# EAGLE board PhycomBridge(Beginner)V6 (EAGLE 9.4.1)
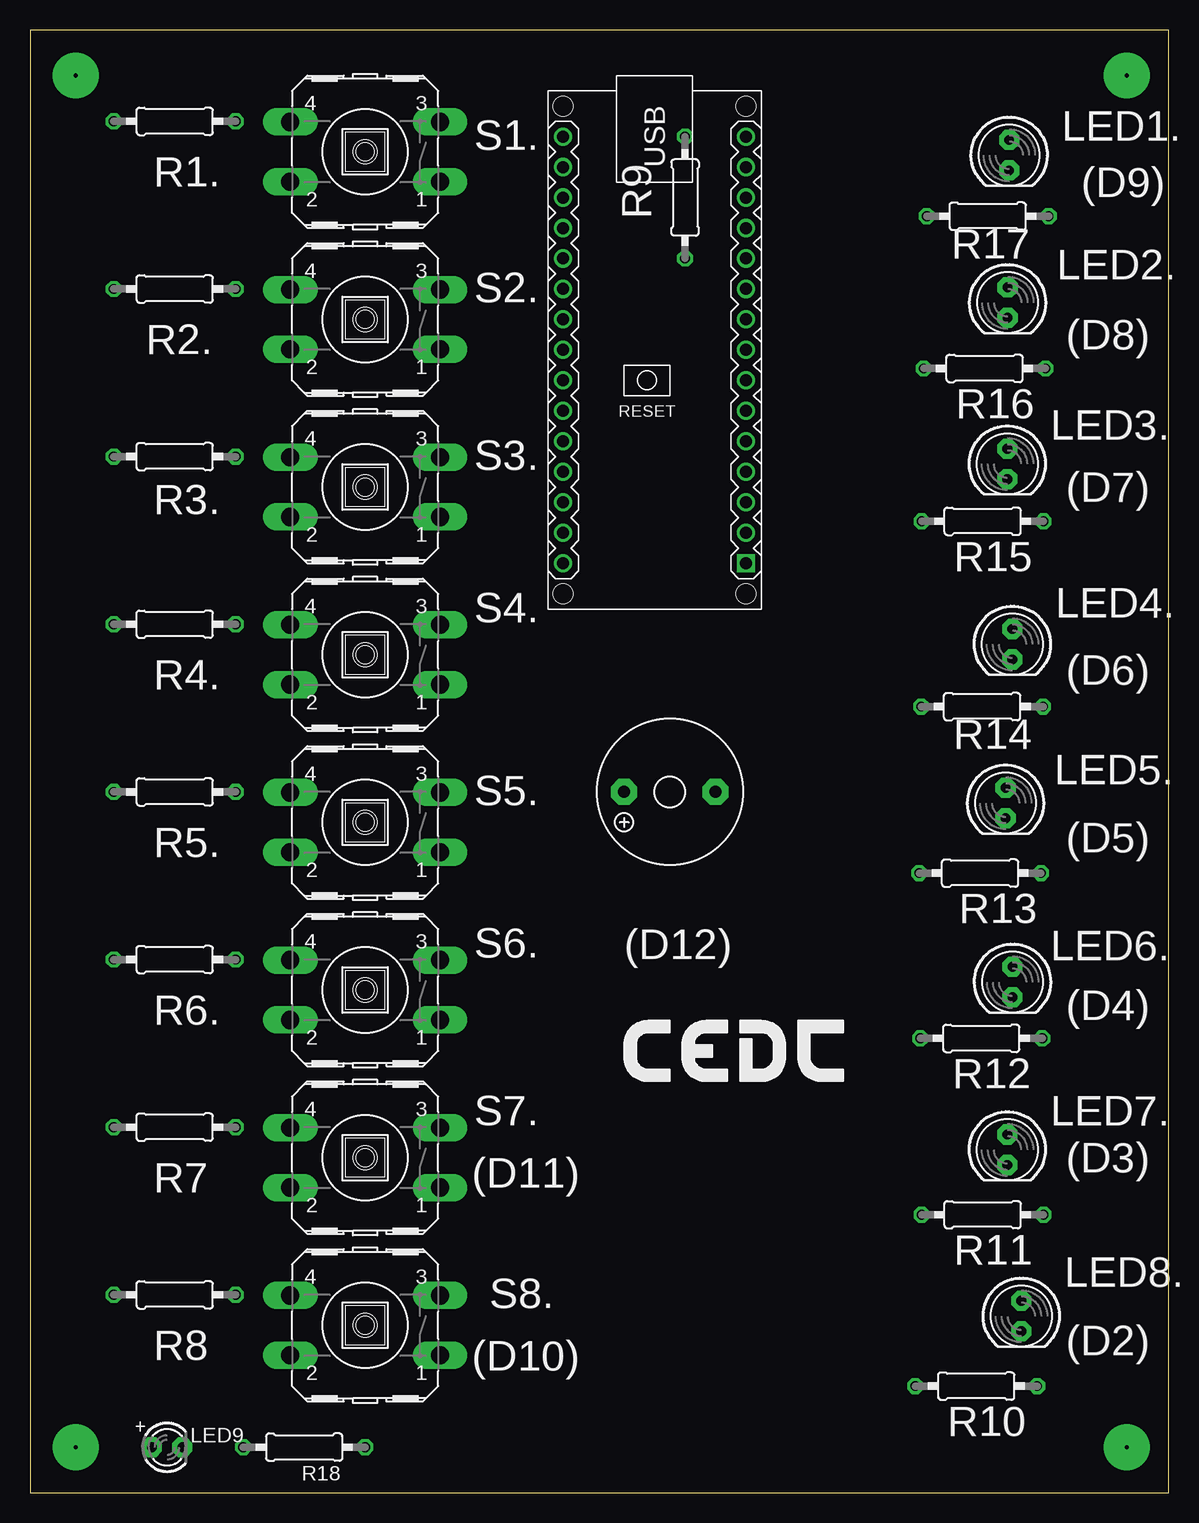
[diagram p0: board, top side]
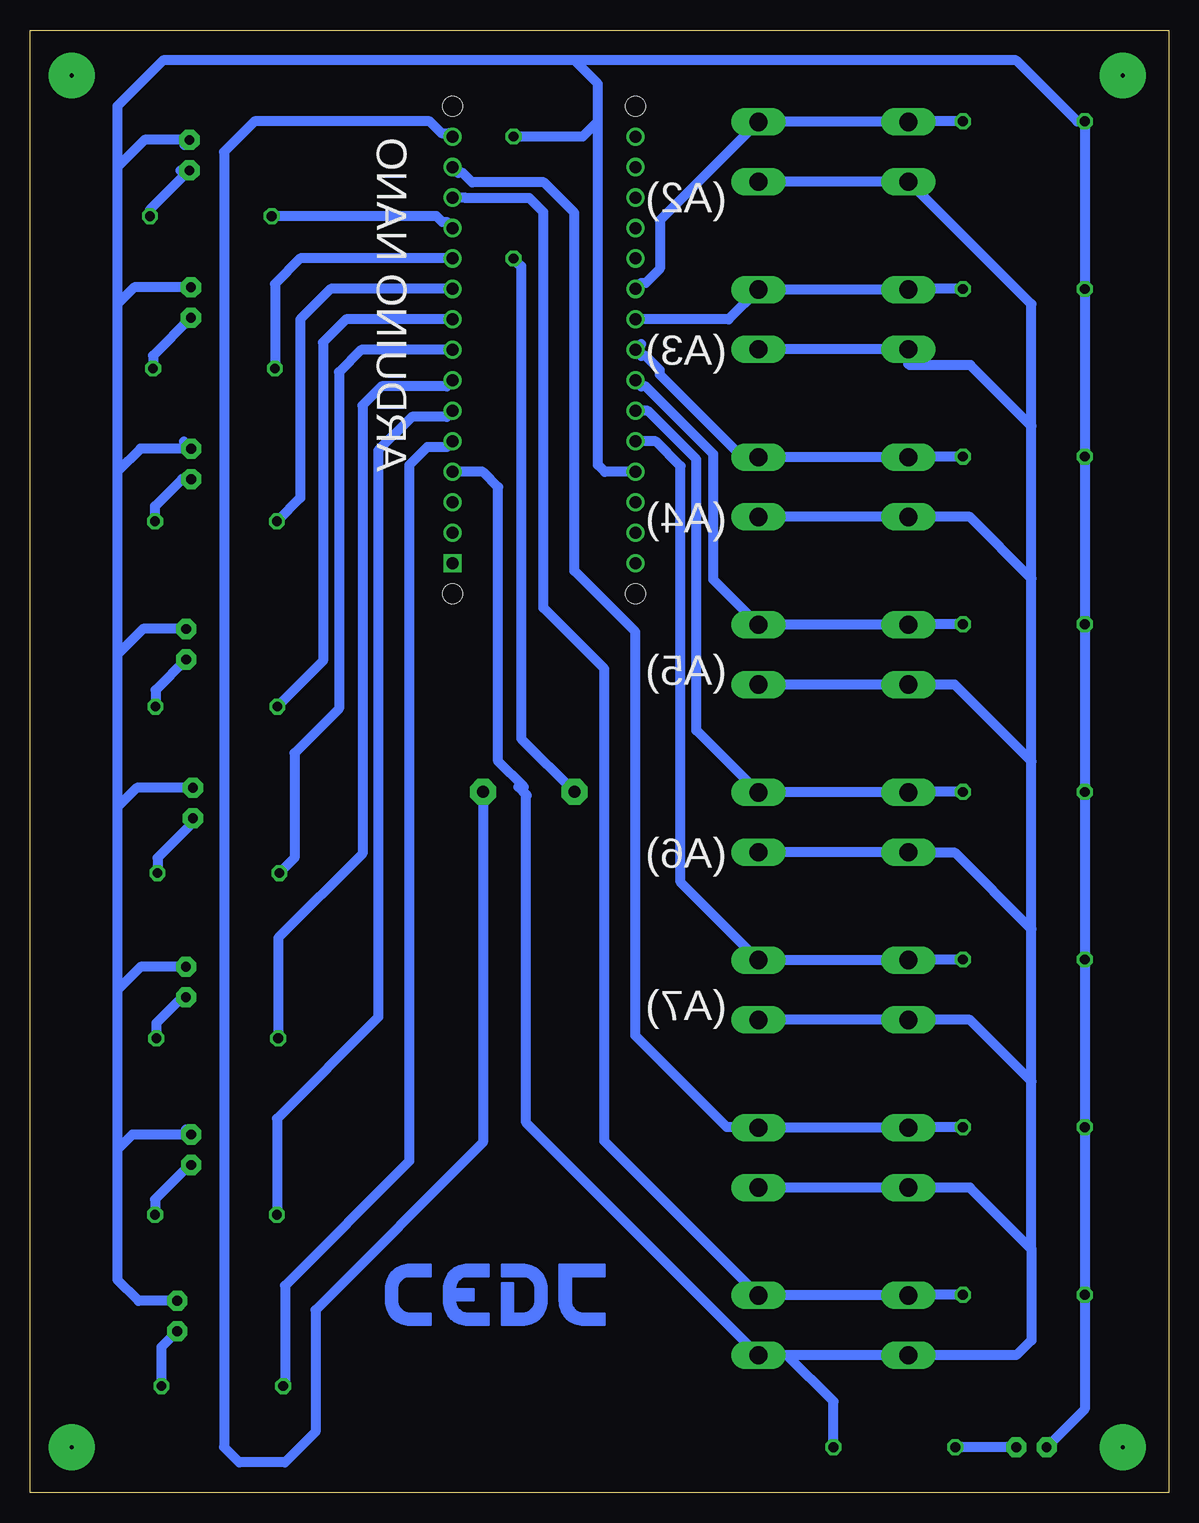
[diagram p1: board, bottom side, seen from below]

Size 94.92 x 121.91 mm. Coordinates in mm from the lower left corner, seen from the top.
Outline: 0,0 94.92,0 94.92,121.91 0,121.91 0,0
Copper layers (1*16): Top 0.035mm / dielectric 1.5mm / Bottom 0.035mm
Design rules "default *": minimum track width 6mil, minimum drill 0.35mm, track to track 20mil, track to pad 35mil, pad to pad 20mil, via to via 20mil, smd to smd 20mil, copper to edge 40mil, drill to drill 6mil, minimum pad ring 10mil, minimum via ring 8mil, stop-mask expansion 4mil, vias tented up to drill 0mil, thermal gap 10mil

## Footprints (pad centres in the part's own frame; a part is rotated, then mirrored left to right if it is on the bottom)
ARDUINO-NANO-3.0 = drill 1 square: J1.1 17.78,7.62 | drill 1: J1.2 15.24,7.62; J1.3 12.7,7.62; J1.4 10.16,7.62; J1.5 7.62,7.62; J1.6 5.08,7.62; J1.7 2.54,7.62; J1.8 0,7.62; J1.9 -2.54,7.62; J1.10 -5.08,7.62; J1.11 -7.62,7.62; J1.12 -10.16,7.62; J1.13 -12.7,7.62; J1.14 -15.24,7.62; J1.15 -17.78,7.62; J2.1 17.78,-7.62; J2.2 15.24,-7.62; J2.3 12.7,-7.62; J2.4 10.16,-7.62; J2.5 7.62,-7.62; J2.6 5.08,-7.62; J2.7 2.54,-7.62; J2.8 0,-7.62; J2.9 -2.54,-7.62; J2.10 -5.08,-7.62; J2.11 -7.62,-7.62; J2.12 -10.16,-7.62; J2.13 -12.7,-7.62; J2.14 -15.24,-7.62; J2.15 -17.78,-7.62 | hole 1.651: -20.32,7.62; -20.32,-7.62; 20.32,-7.62; 20.32,7.62
LED5MM = drill 0.813 pad 1.676 octagon: A -1.27,0; K 1.27,0
LED3MM = drill 0.813 pad 1.676 octagon: A -1.27,0; K 1.27,0
0207/10 = drill 0.813 octagon: 1 -5.08,0; 2 5.08,0
B3F-40XX = drill 1.524 long: 1 -6.248,2.489; 2 6.248,2.489; 3 -6.248,-2.489; 4 6.248,-2.489
F/TMB = drill 1.016 pad 2.159 octagon: + 3.81,0; - -3.81,0

## Placement (x,y rotation side)
ARDUINO_NANO  ARDUINO-NANO-3.0  [ARDUINO-NANO-3.0]  52.07,95.25 270 top
LED1.  [LED5MM]  81.63,111.48 270 top
LED2.  [LED5MM]  81.5,99.19 270 top
LED3.  [LED5MM]  81.48,85.75 270 top
LED4.  [LED5MM]  81.9,70.73 270 top
LED5.  [LED5MM]  81.33,57.49 270 top
LED6.  [LED5MM]  81.91,42.57 270 top
LED7.  [LED5MM]  81.48,28.6 270 top
LED8.  [LED5MM]  82.64,14.74 270 top
LED9  [LED3MM]  11.43,3.81 0 top
LOGO1  LOGO-CEDTBOT-18MM  [LOGO-CEDT-BOT-18MM]  46.99,13.97 0 top
LOGO2  LOGO-CEDTSILK-18MM  [LOGO-CEDT-SILK-18MM]  49.53,34.29 0 top
R1.  10k  [0207/10]  12.06,114.3 0 top
R2.  10k  [0207/10]  12.06,100.33 0 top
R3.  10k  [0207/10]  12.06,86.36 0 top
R4.  10k  [0207/10]  12.06,72.39 0 top
R5.  10k  [0207/10]  12.06,58.42 0 top
R6.  10k  [0207/10]  12.06,44.45 0 top
R7  10k  [0207/10]  12.06,30.48 0 top
R8  10k  [0207/10]  12.06,16.51 0 top
R9  1K  [0207/10]  54.61,107.95 90 top
R10  220  [0207/10]  78.89,8.9 0 top
R11  220  [0207/10]  79.41,23.18 0 top
R12  220  [0207/10]  79.31,37.88 0 top
R13  220  [0207/10]  79.21,51.65 0 top
R14  220  [0207/10]  79.38,65.53 0 top
R15  220  [0207/10]  79.41,80.97 0 top
R16  220  [0207/10]  79.58,93.71 0 top
R17  220  [0207/10]  79.84,106.39 0 top
R18  220  [0207/10]  22.86,3.81 180 top
S1.  OMRON_40-XX  [B3F-40XX]  27.94,111.76 180 top
S2.  OMRON_40-XX  [B3F-40XX]  27.94,97.79 180 top
S3.  OMRON_40-XX  [B3F-40XX]  27.94,83.82 180 top
S4.  OMRON_40-XX  [B3F-40XX]  27.94,69.85 180 top
S5.  OMRON_40-XX  [B3F-40XX]  27.94,55.88 180 top
S6.  OMRON_40-XX  [B3F-40XX]  27.94,41.91 180 top
S7.  OMRON_40-XX  [B3F-40XX]  27.94,27.94 180 top
S8.  OMRON_40-XX  [B3F-40XX]  27.94,13.97 180 top
SG1  BUZZER  [F/TMB]  53.34,58.42 180 top

## Library data of the parts
ARDUINO_NANO = diy-modules
LED1. LED2. LED3. LED4. LED5. LED6. LED7. LED8. LED9 = adafruit
LOGO1 LOGO2 = CEDT_JANUARY_2015_v5
R1. R2. R3. R4. R5. R6. R7-R18 S1. S2. S3. S4. S5. S6. S7. S8. = CEDT_JANUARY_2015_v5 (2)
SG1 = CEDT_JANUARY_2015_v5 (2); OC_FARNELL: unknown; OC_NEWARK: unknown

## Nets
3V3: ARDUINO_NANO.J2.14
+VCC: ARDUINO_NANO.J2.4 LED1..A LED2..A LED3..A LED4..A LED5..A LED6..A LED7..A LED8..A LED9.A R1..1 R2..1 R3..1 R4..1 R5..1 R6..1 R7.1 R8.1 R9.2
.: R9.1 SG1.+
BUZ: ARDUINO_NANO.J1.15 SG1.-
GND: ARDUINO_NANO.J1.4 R18.1 S1..1 S1..2 S2..1 S2..2 S3..1 S3..2 S4..1 S4..2 S5..1 S5..2 S6..1 S6..2 S7..1 S7..2 S8..1 S8..2
GND.2: ARDUINO_NANO.J2.2
LED_1: ARDUINO_NANO.J1.12 R17.1
LED_2: ARDUINO_NANO.J1.11 R16.1
LED_3: ARDUINO_NANO.J1.10 R15.1
LED_4: ARDUINO_NANO.J1.9 R14.1
LED_5: ARDUINO_NANO.J1.8 R13.1
LED_6: ARDUINO_NANO.J1.7 R12.1
LED_7: ARDUINO_NANO.J1.6 R11.1
LED_8: ARDUINO_NANO.J1.5 R10.1
N$1: LED7..K R11.2
N$2: LED6..K R12.2
N$3: LED2..K R16.2
N$4: LED1..K R17.2
N$5: LED5..K R13.2
N$6: LED4..K R14.2
N$7: LED8..K R10.2
N$9: LED3..K R15.2
N$16: LED9.K R18.2
N$36: ARDUINO_NANO.J2.15
S1: ARDUINO_NANO.J2.10 R1..2 S1..3 S1..4
S2: ARDUINO_NANO.J2.9 R2..2 S2..3 S2..4
S3: ARDUINO_NANO.J2.8 R3..2 S3..3 S3..4
S4: ARDUINO_NANO.J2.7 R4..2 S4..3 S4..4
S5: ARDUINO_NANO.J2.6 R5..2 S5..3 S5..4
S6: ARDUINO_NANO.J2.5 R6..2 S6..3 S6..4
S7: ARDUINO_NANO.J1.14 R7.2 S7..3 S7..4
S8: ARDUINO_NANO.J1.13 R8.2 S8..3 S8..4
VIN: ARDUINO_NANO.J2.1

## Tracks (layer width: path | path; a pad name or v marks a point on that pad's centre or on a via)
+VCC
  Bottom 0.813: ARDUINO_NANO.J2.4 46.99,85.09 47.57,85.67 47.57,114.3 | 49.53,119.38 12.7,119.38 7.62,114.3 R1..1 R2..1 R3..1 R4..1 R5..1 R6..1 R7.1 R8.1 6.99,6.99 LED9.A | 49.53,119.38 83.82,119.38 87.63,115.57 87.63,110.49 | 81.91,30.3 LED7..A 86.36,29.87 87.63,28.6 | 82.09,87.63 LED3..A 85.7,87.02 87.63,85.09 | 87.63,28.6 87.63,17.78 85.86,16.01 LED8..A | 47.57,114.3 47.57,117.42 49.53,119.38 | 47.57,114.3 48.84,113.03 R9.2 | 82.04,112.34 LED1..A 85.37,112.75 87.63,110.49 | 87.63,110.49 87.63,99.06 | 87.63,99.06 87.63,85.09 | 87.63,85.09 87.63,69.85 | 87.63,69.85 87.63,57.15 | 87.63,57.15 87.63,41.91 | 87.63,41.91 87.63,28.6 | LED2..A 86.23,100.46 87.63,99.06 | LED4..A 85.48,72 87.63,69.85 | LED5..A 86.02,58.76 87.63,57.15 | LED6..A 85.7,43.84 87.63,41.91
.
  Bottom 0.813: R9.1 53.98,102.23 53.98,62.87 SG1.+
BUZ
  Bottom 0.813: SG1.- 57.15,29.21 71.12,15.24 71.12,5.08 73.66,2.54 77.47,2.54 78.74,3.81 78.74,111.76 76.2,114.3 61.6,114.3 60.62,113.32 59.98,113.32 ARDUINO_NANO.J1.15
GND
  Bottom 0.813: S1..1 S1..2 21.64,109.22 21.59,109.22 11.43,99.06 11.43,88.9 | S2..1 S2..2 21.69,94.08 21.59,93.98 16.51,93.98 11.43,88.9 | S2..1 33.6,95.3 | S2..1 34.19,94.72 | S3..1 S3..2 16.56,81.33 11.43,76.2 | S5..1 S5..2 22.81,53.39 22.86,53.34 17.78,53.34 11.43,46.99 | S6..1 S6..2 16.56,39.42 11.43,34.29 | S4..1 S4..2 17.83,67.36 11.43,60.96 | S8..1 S8..2 12.7,11.48 11.48,12.7 11.43,12.7 11.43,20.32 | 11.43,20.32 11.43,34.29 | 11.43,34.29 11.43,46.99 | 11.43,46.99 11.43,60.96 | 11.43,60.96 11.43,76.2 | 11.43,76.2 11.43,88.9 | S7..1 S7..2 16.56,25.45 11.43,20.32 | 53.51,58.13 53.57,58.19 | 53.57,58.19 54.2,58.83 53.75,58.83 55.88,60.96 55.88,83.82 57.15,85.09 ARDUINO_NANO.J1.4 | R18.1 27.94,7.62 31.8,11.48 S8..1 | S8..1 53.57,30.86 53.57,58.19
LED_1
  Bottom 0.813: ARDUINO_NANO.J1.12 60.18,105.9 60.54,105.9 61.03,106.39 R17.1
LED_2
  Bottom 0.813: ARDUINO_NANO.J1.11 72.39,102.87 74.5,100.76 R16.1
LED_3
  Bottom 0.813: ARDUINO_NANO.J1.10 69.85,100.33 72.39,97.79 72.39,82.91 R15.1
LED_4
  Bottom 0.813: ARDUINO_NANO.J1.9 68.58,97.79 70.48,95.89 70.48,69.34 R14.1
LED_5
  Bottom 0.813: ARDUINO_NANO.J1.8 67.31,95.25 69.16,93.4 69.16,65.35 72.86,61.66 72.86,52.92 R13.1
LED_6
  Bottom 0.813: ARDUINO_NANO.J1.7 60.18,92.22 65.62,92.22 67.21,90.63 67.21,53.27 74.23,46.25 R12.1
LED_7
  Bottom 0.813: ARDUINO_NANO.J1.6 60.18,89.68 63.08,89.68 65.89,86.87 65.89,39.65 74.33,31.2 R11.1
LED_8
  Bottom 0.813: ARDUINO_NANO.J1.5 60.18,87.14 61.81,87.14 63.3,85.65 63.3,27.64 73.66,17.28 73.66,8.89 73.8,8.89 R10.1
N$1
  Bottom 0.813: LED7..K 81.62,27.33 84.49,24.45 R11.2
N$2
  Bottom 0.813: LED6..K 82.24,41.3 84.39,39.15 R12.2
N$3
  Bottom 0.813: LED2..K 84.66,94.77 R16.2
N$4
  Bottom 0.813: 82.38,110.21 LED1..K 84.92,106.92 R17.2
N$5
  Bottom 0.813: LED5..K 81.33,55.88 84.29,52.92 R13.2
N$6
  Bottom 0.813: LED4..K 84.46,66.9 R14.2
N$7
  Bottom 0.813: LED8..K 83.97,12.14 R10.2
N$9
  Bottom 0.813: R15.2 84.49,82.24 82.25,84.48 LED3..K
N$10  (via drill 0.35 pad 3.81)
  other vias: 3.81,118.11
N$11  (via drill 0.35 pad 3.81)
  other vias: 91.44,118.11
N$12  (via drill 0.35 pad 3.81)
  other vias: 3.81,3.81
N$13  (via drill 0.35 pad 3.81)
  other vias: 91.44,3.81
N$16
  Bottom 0.813: LED9.K R18.2
S1
  Bottom 0.813: S1..3 S1..4 21.64,114.3 R1..2 | S1..3 33.07,114.25 | S1..3 42.4,106.04 42.4,102.02 43.6,100.82 43.96,100.82 ARDUINO_NANO.J2.10
S2
  Bottom 0.813: S2..3 S2..4 21.64,100.33 R2..2 | S2..3 34.29,100.18 | S2..3 36.68,97.79 ARDUINO_NANO.J2.9
S3
  Bottom 0.813: 43.96,95.74 ARDUINO_NANO.J2.8 43.96,94.76 43.6,94.76 42.4,93.56 42.4,93.2 35.51,86.31 S3..3 S3..4 21.64,86.36 R3..2
S4
  Bottom 0.813: ARDUINO_NANO.J2.7 43.96,92.22 43.6,92.22 37.96,86.57 37.96,76.11 S4..3 S4..4 21.64,72.39 R4..2
S5
  Bottom 0.813: S5..3 S5..4 21.64,58.42 R5..2 | S5..3 34.24,58.37 | S5..3 34.24,58.42 35.56,58.42 35.51,58.37 S5..3 | S5..3 39.37,63.55 39.37,86.12 43.42,90.17 ARDUINO_NANO.J2.6
S6
  Bottom 0.813: ARDUINO_NANO.J2.5 42.75,87.63 40.69,85.57 40.69,50.9 S6..3 S6..4 21.64,44.45 R6..2
S7
  Bottom 0.813: 34.14,30.48 S7..3 | S7..3 S7..4 21.64,30.48 R7.2 | S7..3 34.24,30.48 36.83,30.48 44.45,38.1 44.45,71.75 49.53,76.83 49.53,106.68 52.07,109.22 58.06,109.22 58.84,110 59.2,110 ARDUINO_NANO.J1.14
S8
  Bottom 0.813: ARDUINO_NANO.J1.13 58.66,107.95 58.61,107.9 53.29,107.9 52.12,106.73 52.12,73.74 47.04,68.66 47.04,29.31 S8..3 S8..4 21.64,16.51 R8.2

## Text on the board
tNames: (D9) | (D8) | (D7) | (D6) | (D5) | (D12) | (D4) | (D3) | (D11) | (D2) | (D10)
bNames: (A2) | (A3) | ARDUINO NANO | (A4) | (A5) | (A6) | (A7)